# EAGLE board hello4 (EAGLE 4.16)
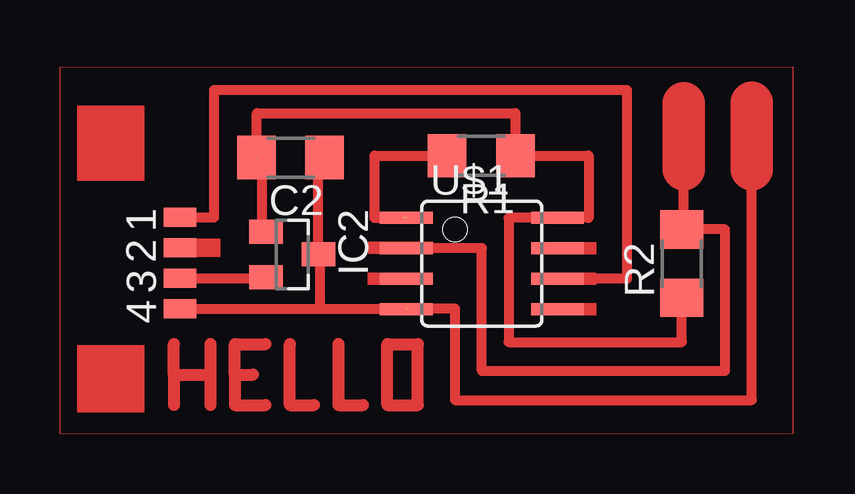
[diagram p0: board, top side]

No outline drawn. Coordinates in mm, seen from the top.
Copper layers (1*16): Top 0.035mm / dielectric 1.5mm / Bottom 0.035mm
Design rules "default": minimum track width 10mil, minimum drill 24mil, track to track 8mil, track to pad 8mil, pad to pad 8mil, via to via 8mil, smd to smd 8mil, copper to edge 40mil, drill to drill 8mil, minimum pad ring 10mil, minimum via ring 8mil, stop-mask expansion 4mil, vias tented up to drill 0mil, thermal gap 10mil

## Footprints (pad centres in the part's own frame; a part is rotated, then mirrored left to right if it is on the bottom)
1206 = smd 1.6 x 1.803: 1 -1.422,0; 2 1.422,0
SOT23 = smd 1 x 1.4: 1 -0.95,-1.1; 2 0.95,-1.1; 3 0,1.1
MICRO_4 = smd 0.787 x 1.346: 1 -1.905,1.626; 2 -0.635,1.626; 3 0.635,1.626; 4 1.905,1.626
SOIC8 = smd 0.5 x 2.2: 1 -1.905,-3.154; 2 -0.645,-3.154; 3 0.625,-3.154; 4 1.895,-3.154; 5 1.905,3.154; 6 0.635,3.154; 7 -0.635,3.154; 8 -1.905,3.154

## Placement (x,y rotation side)
C2  3.3uF  [1206]  9.65,11.51 180 top
IC2  5V regulator  [SOT23]  9.73,7.47 270 top
R1  10k  [1206]  17.6,11.58 180 top
R2  4.99k  [1206]  25.96,7.09 90 top
SERIAL  [MICRO_4]  3.43,7.11 270 top
U$1  ATTINY45SI  [SOIC8]  17.63,7.09 270 top

## Library data of the parts
C2 IC2 R1 R2 SERIAL U$1 = ng

## Nets
N$1: C2.2 IC2.1 R1.1 R2.1 U$1.8
N$2: C2.1 IC2.3 SERIAL.4 U$1.4
N$3: IC2.2 SERIAL.3
N$4: SERIAL.1 U$1.6
N$6: R1.2 U$1.1
N$8: R2.2 U$1.2

## Tracks (layer width: path | path; a pad name or v marks a point on that pad's centre or on a via)
N$1  (1 unrouted)
  Top 0.406: C2.2 8.48,11.51 8.48,8.42 IC2.1 | 8.26,11.51 8.26,13.36 19.02,13.36 R1.1 22.07,11.58 22.07,8.99 20.8,8.99 | U$1.8 20.8,8.99 | 20.8,8.99 18.75,8.99 18.75,3.81 25.96,3.81 R2.1
N$2  (1 unrouted)
  Top 0.406: SERIAL.4 10.9,5.21 | 10.9,5.21 10.9,7.47 IC2.3 10.82,11.51 | 10.82,11.51 10.82,11.58 | 10.82,11.51 C2.1 | 10.9,5.21 14.53,5.21
N$3
  Top 0.406: IC2.2 8.66,6.52 8.66,6.48 SERIAL.3
N$4
  Top 0.406: SERIAL.1 6.48,9.02 6.48,14.33 23.67,14.33 23.67,6.45 U$1.6 20.62,6.45
N$5
  Top 0: 0.05,15.27 30.61,15.29 30.61,0.03 0.05,0 0.05,15.27
N$6  (1 unrouted)
  Top 0.406: R1.2 13.16,11.58 13.16,8.99 14.38,8.99
N$8
  Top 0.406: U$1.2 17.63,7.73 17.63,2.62 27.76,2.62 27.76,8.51 R2.2 | R2.2
N$10
  Top 0.406: 26.04,8.69 26.04,11.02
  Top 1.778: 26.04,11.02 26.04,13.77
N$11
  Top 0.406: 28.88,11.02 28.88,1.4 16.51,1.4 16.51,5.21 15.49,5.21
  Top 1.778: 28.88,11.02 28.88,13.79
N$17
  Top 0.508: 4.8,2.46 4.8,1.19 | 4.8,2.46 4.8,3.73 | 4.8,2.46 6.33,2.46
N$19
  Top 0.508: 6.33,1.19 6.33,3.73
N$20
  Top 0.508: 7.34,2.46 7.34,3.73 8.61,3.73 | 7.34,2.46 7.34,1.19 8.61,1.19 | 7.34,2.46 8.1,2.46
N$21
  Top 0.508: 9.63,3.73 9.63,1.19 10.64,1.19
N$22
  Top 0.508: 11.66,3.73 11.66,1.19 12.68,1.19
N$23
  Top 0.508: 13.69,1.19 14.96,1.19 14.96,3.73 13.69,3.73 13.69,1.19
(copper drawn outside any net)
  shapes: Top area x8